# Altium PCB PCB2.PcbDoc
Units mil, origin at the board's own origin, x right, y up, seen from the top; angles counter-clockwise.
Board outline 3600 x 3000 mil, 2 copper layers (Top Layer, Bottom Layer), stack 61.756 mil thick; 20 components, 21 nets, 81 pads, 10 vias.
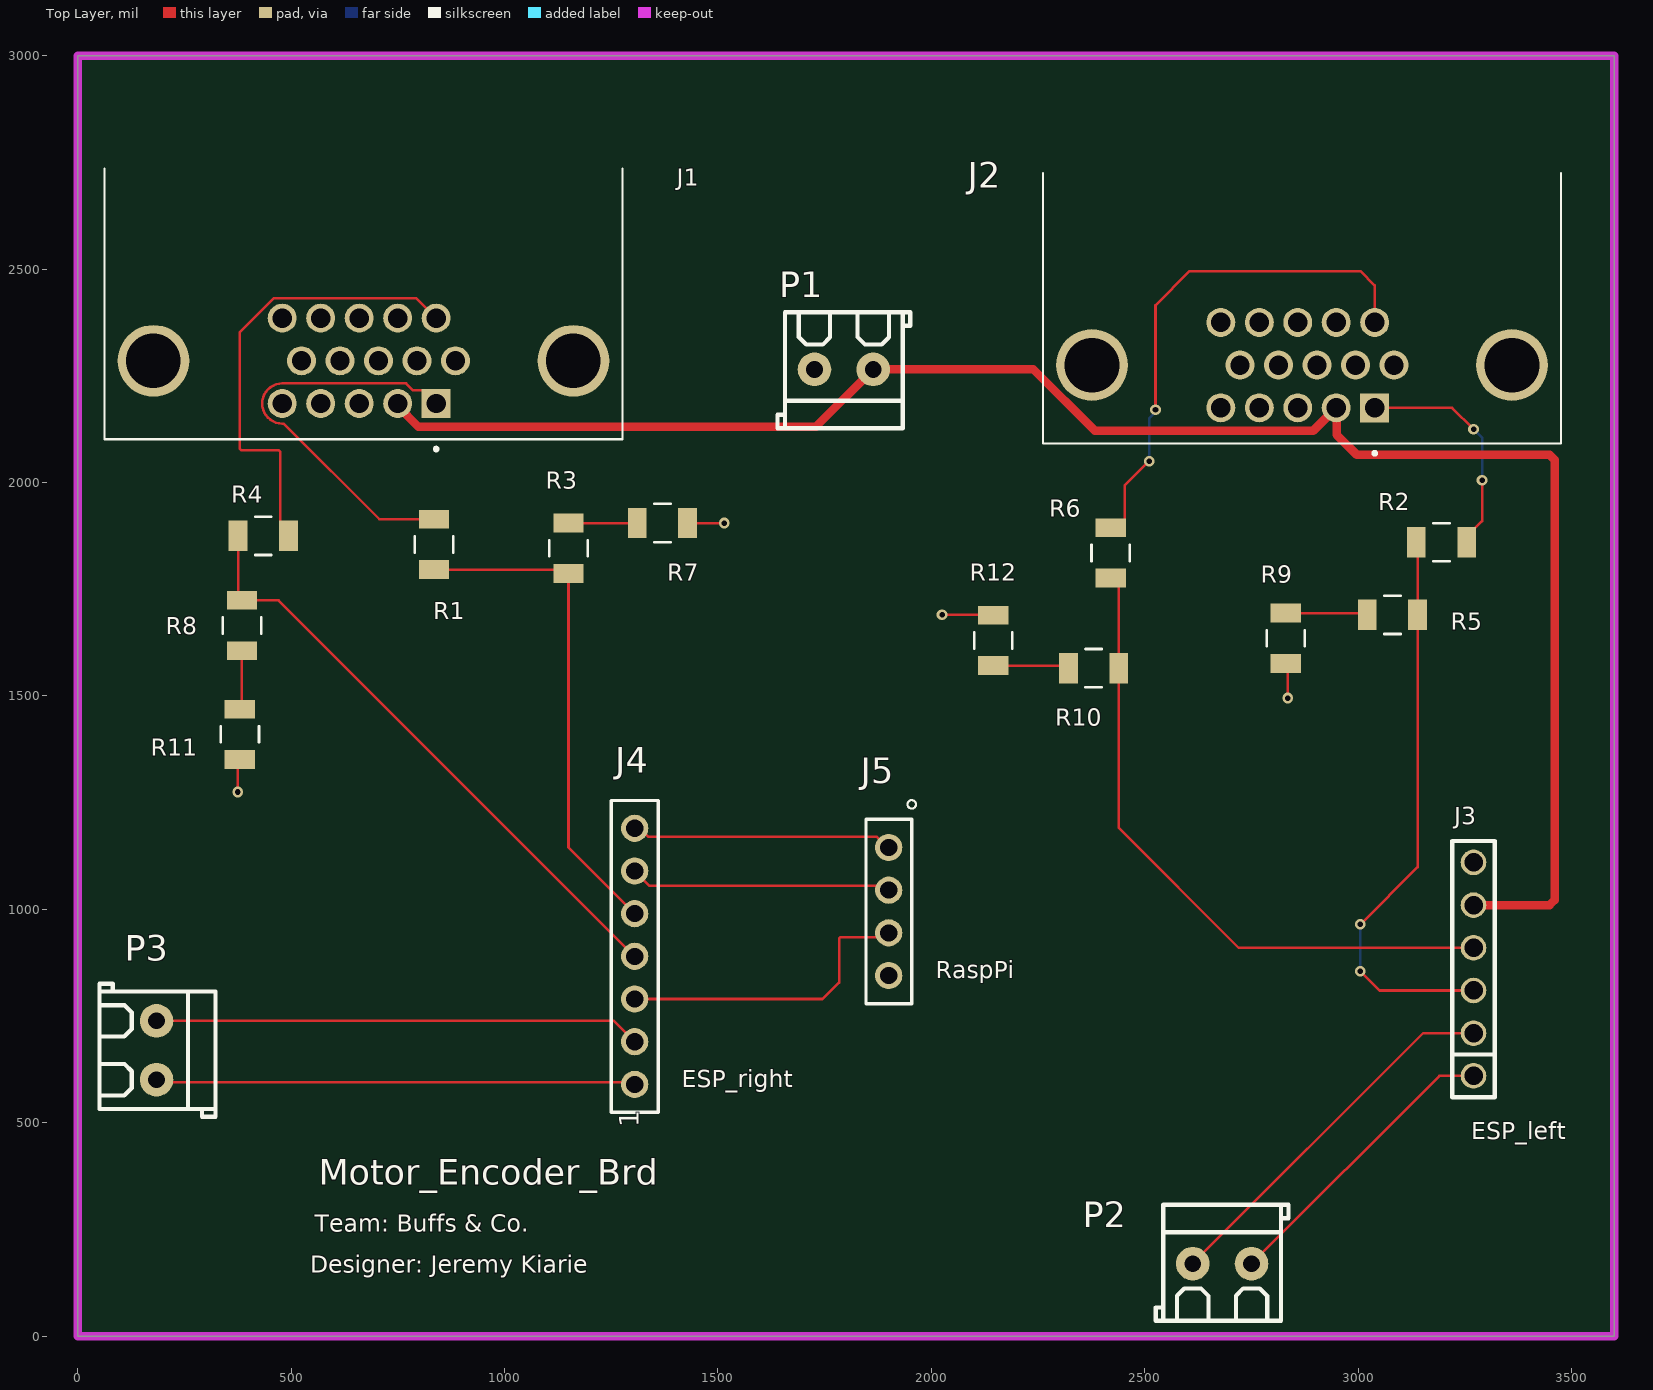
[diagram p0: Top Layer view]
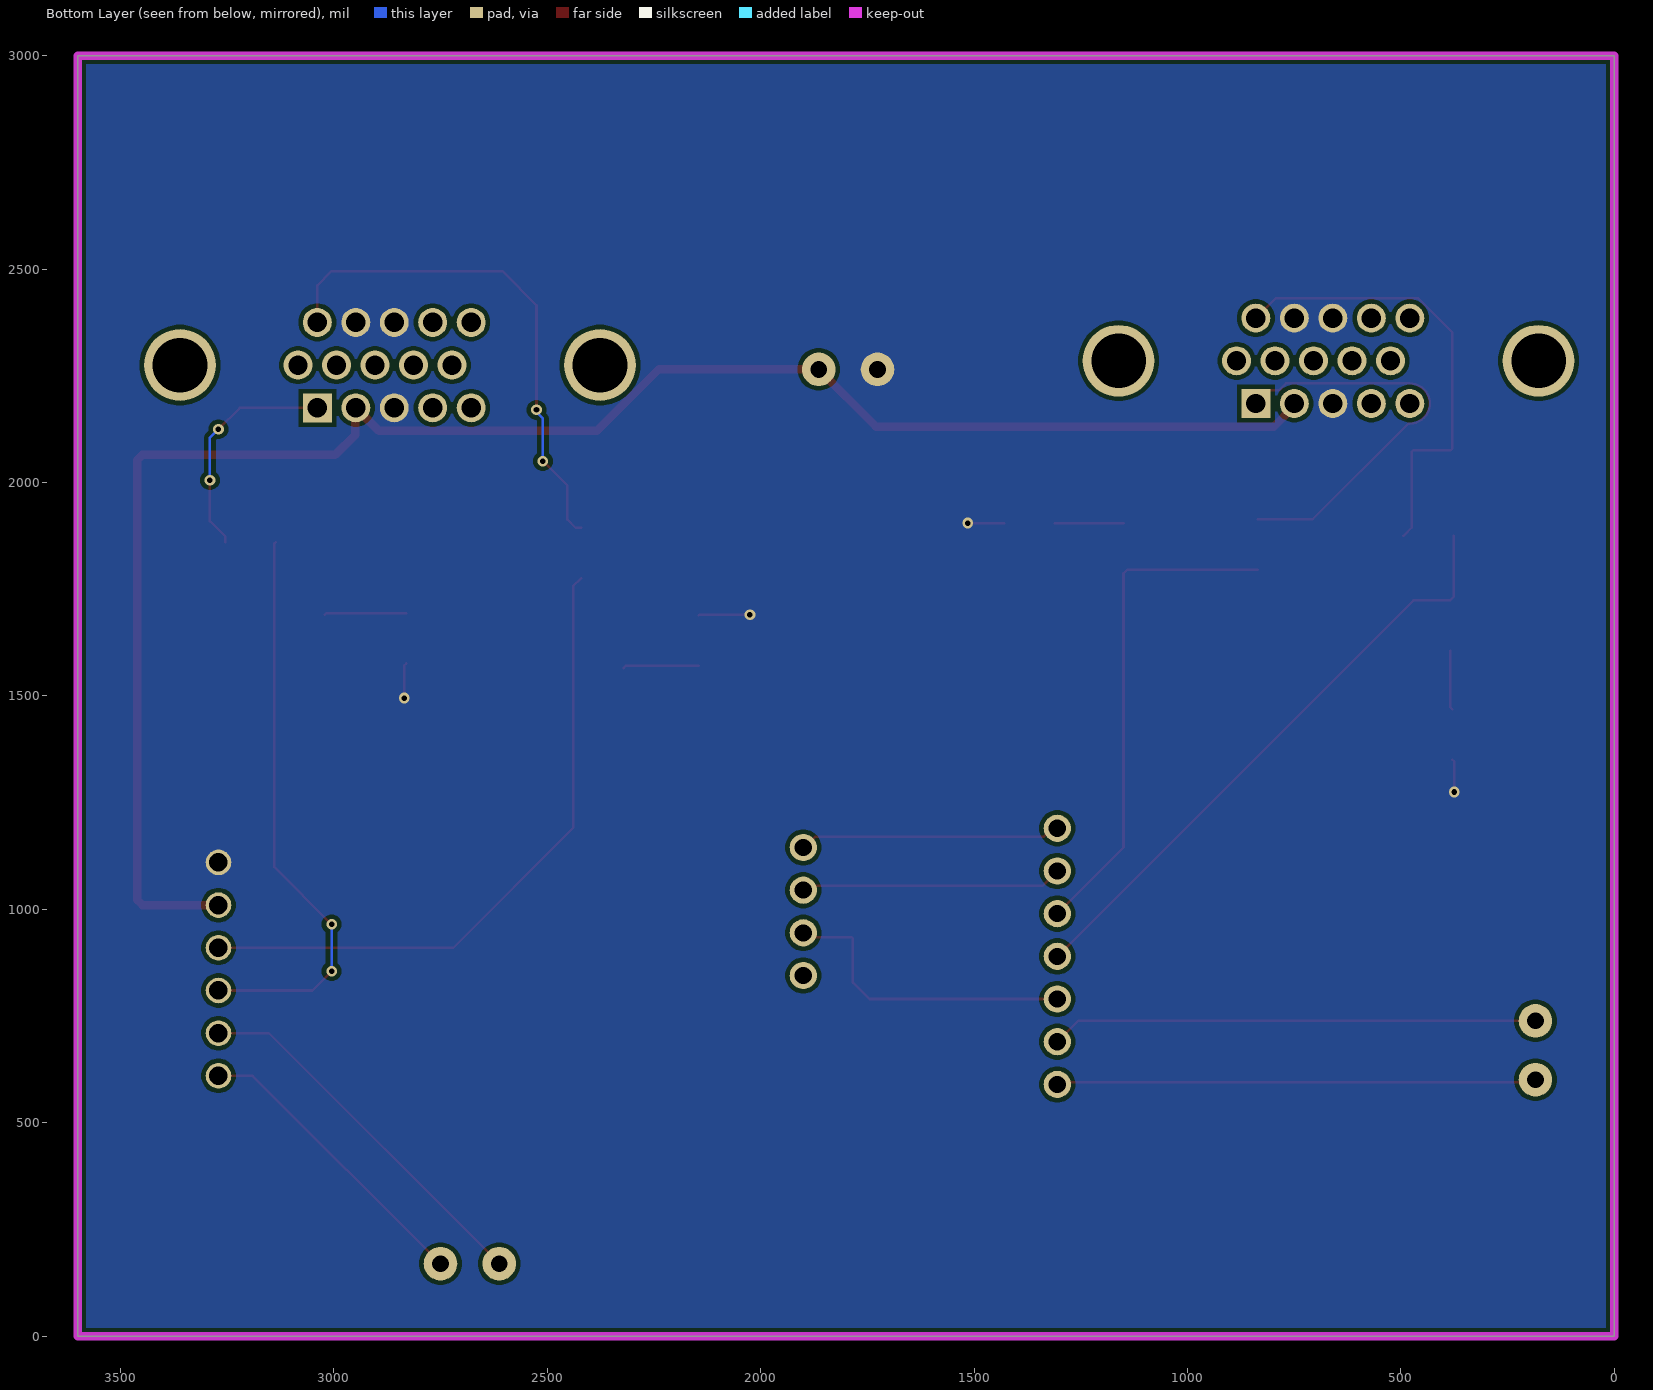
[diagram p1: Bottom Layer view, seen from below]
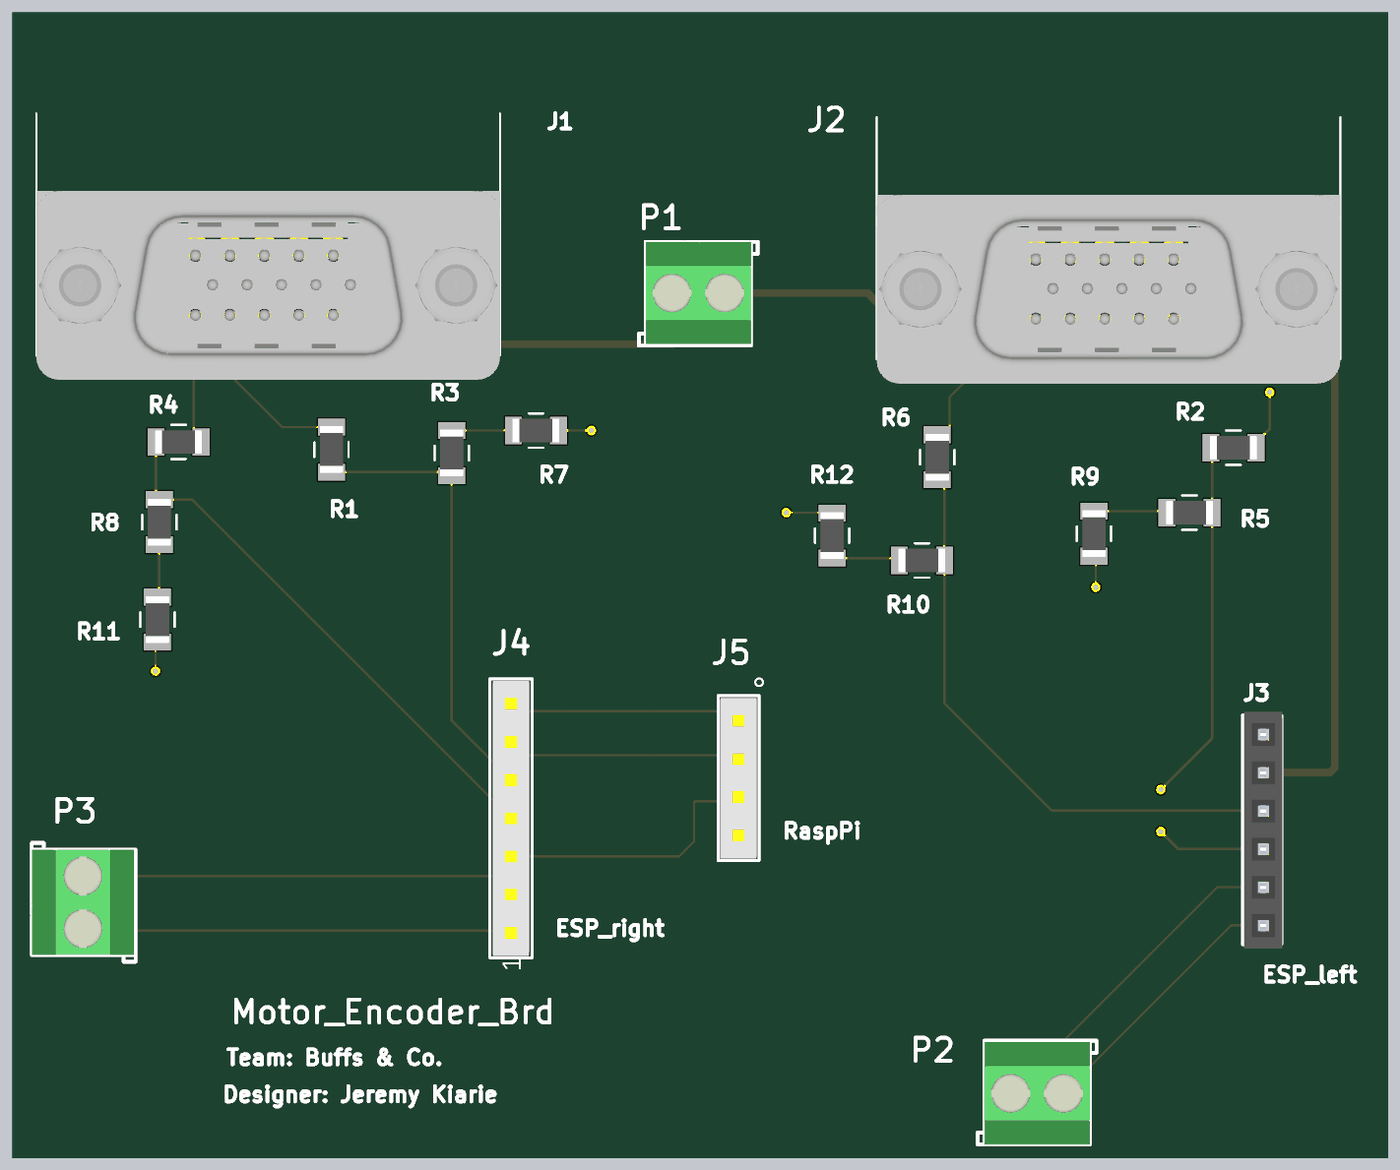
[diagram p2: 3D render of the assembled board from above, using the file's embedded part models]

## Layer stack, top to bottom
Top Solder: solder mask 1, SM-001, Dk 4
Top Layer: signal copper 1.378
Dielectric 1: core 59, Core-043, Dk 4.3
Bottom Layer: signal copper 1.378
Bottom Solder: solder mask 1, SM-001, Dk 4

## Board outline
0,0 3600,0 3600,3000 0,3000

## Design rules (kind name [scope] priority, off if disabled: settings)
Clearance [All] p1: gap=10 ignorepadtopadclearanceinfootprint=FALSE
PlaneClearance [All] p1: clearance=10
PlaneConnect [All] p1: planeconnectstyle=Direct reliefexpansion=20 reliefentries=4 reliefconductorwidth=10 reliefairgap=10
PolygonConnect [All] p1: connectstyle=Direct reliefconductorwidth=10 reliefentries=4 polygonreliefangle="90 Angle" airgapwidth=10
RoutingVias [All] p1: holewidth=13 width=25 viastyle="Through Hole" minholewidth=13 minwidth=25 maxholewidth=60 maxwidth=80
SolderMaskExpansion [All] p1: expansion=4 istentingtop=FALSE
SupplyNets "Schematic Supply Nets_1" [InNet('GND')] p1: voltage=0.000
SupplyNets "Schematic Supply Nets" [InNet('+5')] p2: voltage=0.000
UnRoutedNet [All] p1: checkbadconnections=TRUE
Width "Schematic Width Constraint" [InNet('+5')] p1: maxlimit=100 minlimit=10 preferedwidth=20 minimp=50.000000 maximp=50.000000 favimp=50.000000
Width [All] p2: maxlimit=100 minlimit=6 preferedwidth=6 minimp=50.000000 maximp=50.000000 favimp=50.000000
27 further rules are at their usual default settings.

## Components (designator, comment, footprint, x,y, rotation, side; value= is the part's Value field where it differs from the comment)
J1 "L717HDE15PD1CH4F" AMPHENOL_L717HDE15PD1CH4F 669.53,2285 r180 top
J2 "L717HDE15PD1CH4F" AMPHENOL_L717HDE15PD1CH4F 2868.07,2275 r180 top
J3 "PPTC061LFBN-RC" "6_PIN_100MIL -Female" 3270,610 r90 top value=Female
J4 "SAMTEC-SSQ-107-01-X-SJ" JF-7_SSQ-107-01-X-S 1305,890 r90 top
J5 "SAMTEC-SSQ-104-01-X-SJ" JF-4_SSQ-104-01-X-S 1900,995 r270 top
P1 "2P Screw Terminal Block" "P_Terminal block 3.5mm-pitch" 1795,2265 r180 top
P2 "2P Screw Terminal Block" "P_Terminal block 3.5mm-pitch" 2681.1,170 r0 top
P3 "2P Screw Terminal Block" "P_Terminal block 3.5mm-pitch" 185,670 r270 top
R1 "1k" 1206_Passive_Resitor 835,1855 r90 top value="1K Ohm"
R2 "1k" 1206_Passive_Resitor 3195,1860 r0 top value="1K Ohm"
R3 "1k" 1206_Passive_Resitor 1150,1846 r270 top value="1K Ohm"
R4 "1k" 1206_Passive_Resitor 435,1875 r180 top value="1K Ohm"
R5 "1k" 1206_Passive_Resitor 3080,1690 r0 top value="1K Ohm"
R6 "1k" 1206_Passive_Resitor 2420,1835 r270 top value="1K Ohm"
R7 "1k" 1206_Passive_Resitor 1370,1905 r180 top value="1K Ohm"
R8 "1k" 1206_Passive_Resitor 385,1665 r90 top value="1K Ohm"
R9 "1k" 1206_Passive_Resitor 2830,1635 r90 top value="1K Ohm"
R10 "1k" 1206_Passive_Resitor 2380,1565 r0 top value="1K Ohm"
R11 "1k" 1206_Passive_Resitor 380,1410 r90 top value="1K Ohm"
R12 "1k" 1206_Passive_Resitor 2145,1630 r270 top value="1K Ohm"

## Footprints (in the part's own frame and the unit in brackets; to place one, negate y for a bottom-side part, rotate by r counter-clockwise, add the part's x,y. Pads: shape width x height; smd on the part's side, far side on the other; paste and mask are expansions set on the pad)
"6_PIN_100MIL -Female" [mil]
  round 60 hole 43.31: 1(0,0) 2(100,0) 3(200,0) 4(300,0) 5(400,0) 6(500,0)
  silkscreen extent -50,-50 550,50, body extent -61,-53 559,47, height 335
1206_Passive_Resitor [mil]
  rect 44x71 smd: 1(-59,0) 2(59,0)
  silkscreen extent -19,-45 19,45, body extent -61,-31 61,31, height 26
AMPHENOL_L717HDE15PD1CH4F [mm]
  rect 1.725x1.725 / inner round 1.725 / far side rect 1.725x1.725 hole 1.15: 1(-4.33,2.54)
  round 1.725 hole 1.15: 2(-2.04,2.54) 3(0.25,2.54) 4(2.54,2.54) 5(4.83,2.54) 6(-5.475,0) 7(-3.185,0) 8(-0.895,0) 9(1.395,0) 10(3.685,0) 11(-4.33,-2.54) 12(-2.04,-2.54) 13(0.25,-2.54) 14(2.54,-2.54) 15(4.83,-2.54)
  round 4.266 hole 3.25: SH1(-12.495,0) SH2(12.495,0)
  silkscreen extent -15.41,-11.43 15.41,5.35, body extent -15.41,-10.07 15.41,6.27, height 8.9
JF-4_SSQ-104-01-X-S [mm]
  round 1.62 hole 1.02: 1(-3.81,0) 2(-1.27,0) 3(1.27,0) 4(3.81,0)
  silkscreen extent -6.63,-1.35 5.49,1.63, body extent -5.33,-1.21 5.33,1.21, height 8.51
JF-7_SSQ-107-01-X-S [mm]
  round 1.62 hole 1.02: 1(-7.62,0) 2(-5.08,0) 3(-2.54,0) 4(0,0) 5(2.54,0) 6(5.08,0) 7(7.62,0)
  silkscreen extent -9.27,-1.4 9.27,1.4, body extent -9.14,-1.21 9.14,1.21, height 8.51
"P_Terminal block 3.5mm-pitch" [mm]
  round 2 hole 1: 1(-1.75,0) 2(1.75,0)
  silkscreen extent -3.95,-3.4 3.95,3.5, body extent -3.5,-3.4 3.5,3.4, height 8.4

## Part data
J1 J2: "Dsub, Stamped Signal 3A, High Density, Right Angle PCB Thru Hole, FP=8.89mm (0.35Î¼in), 15 Pin, Flash Gold, 4-40 Front Screwlock, Ground Tab, With Boardlock", Package=None, Check_prices=https://www.snapeda.com/parts/L717HDE15PD1CH4F/Amphenol+FCI/view-part/?ref=eda, MF="Amphenol ICC", MP=L717HDE15PD1CH4F, SnapEDA_Link=https://www.snapeda.com/parts/L717HDE15PD1CH4F/Amphenol+FCI/view-part/?ref=snap
J3: library part JF_6_PIN_FEMALE, "6 Position Header Connector 0.100\" (2.54mm) Through Hole Tin", LCSC Part#=C40877, Digikey Link=https://www.digikey.com/product-detail/en/PPTC061LFBN-RC/S7004-ND/810145/?itemSeq=304982353, MFR Part #=PPTC061LFBN-RC, Type=Extended
J4: library part JF_7_PIN_FEMALE, "2.54mm Brass Straight 1x7P 7 1 Straight,P=2.54mm  Female Headers ROHS", LCSC Part#=C124418, MFR Part #=B-2200S07P-A120, MP=SAMTEC-SSQ-107-01-X-SJ
J5: library part JF_4_PIN_FEMALE, "2.54mm 3A bronze -40℃~+105℃ Straight 1x4P Top 4 1 Square Holes Straight,P=2.54mm  Female Headers ROHS", LCSC Part#=C2718488, MFR Part #=SSQ-104-01-X-SJ
P1 P2 P3: library part "P_Terminal block", "Green Straight pin 3.5mm  pitch; P=3.5mm  Screw terminal ROHS", LCSC Part#=C474892, Manufacturer="Cixi Kefa Elec", MFR Part #=KF350-3.5-2P, Datasheet=https://datasheet.lcsc.com/lcsc/2001160007_Cixi-Kefa-Elec-KF350-3-5-2P_C474892.pdf
R1 R2 R3 R4 R5 R6 R7 R8 R9 R10 R11 R12: library part R_1K_1206, "CHIP RESISTOR - SURFACE MOUNT 1KOHMS ±1% 1/4W 1206 ROHS", LCSC Part#=C4410, MFR Part #=RNCP1206FTD1K00CT, Digikey Link=https://www.digikey.com/product-detail/en/RNCP1206FTD1K00/RNCP1206FTD1K00CT-ND/2240675/?itemSeq=304982373, Type=Basic

## Via types
v1: diameter 25, hole 13, Top Layer to Bottom Layer, 10 vias

## Nets (pads, with @x,y where several pads share a name; then routed paths per layer and width w, separated by ;. In a path a pad name is that pad's centre, name@x,y a point inside that pad or via, vN(x,y) a via of type N, cw(c..) or ccw(c..) an arc to the next point about the centre after c; other vN are vias at no path point)
+5: J1.2 J2.2 J3.5 P1.1 | length 4185.9
  Top Layer w20: J1.2 749.84,2178.96 797.76,2131.04 1729.94,2131.04 P1.1 2239.1,2265 2383.05,2121.04 2894.43,2121.04 J2.2 ; J2.2@2949.3,2174.61 2949.3,2112 2996.3,2065 3448.28,2065 3460,2053.28 3460,1021.72 3448.28,1010 J3.5
D_2: J4.1 P3.2 | length 1124.6
  Top Layer w6: P3.2 190.55,595.55 1299.45,595.55 J4.1
D_4: J4.2 P3.1 | length 1140.3
  Top Layer w6: P3.1 1256.1,738.9 J4.2
D_5: J4.3 J5.3 | length 719.4
  Top Layer w6: J4.3 1745,790 1783.75,828.75 1783.75,931.49 1787.26,935 1890,935 J5.3
D_18: J4.4 R4.2 R8.2 | length 1420.2
  Top Layer w6: R4.2 376,1733 R8.2 471,1724 J4.4
D_19: J4.5 R1.1 R3.2 | length 1179.9
  Top Layer w6: R1.1 1141,1796 R3.2 1150,1145 J4.5
D_21: J4.6 J5.2 | length 613.6
  Top Layer w6: J4.6 1340,1055 1890,1055 J5.2
D_22: J4.7 J5.1 | length 613.6
  Top Layer w6: J4.7 1317.4,1190 1337.4,1170 1872.14,1170 1897.14,1145 J5.1
D_25: J3.1 P2.2 | length 702.3
  Top Layer w6: P2.2 3190,610 J3.1
D_26: J3.2 P2.1 | length 881.5
  Top Layer w6: P2.1 3152.2,710 J3.2
D_32: J3.3 R2.1 R5.2 | length 1345.4
  Top Layer w6: v1(3005,855) 3050,810 J3.3 ; v1(3005,965) 3139,1099 R5.2 3139,1857 R2.1
  Bottom Layer w6: v1(3005,855) v1(3005,965)
D_33: J3.4 R6.2 R10.2 | length 1540.3
  Top Layer w6: R6.2 2439,1757 R10.2 2439,1191 2720,910 J3.4
GND: J1.3 J1.12 J1.13 J2.3 J2.12 J2.13 J3.6 P1.2 R7.1 R9.1 R11.1 R12.1 | length 367.6
  Top Layer w6: v1(375,1275) 375,1346 R11.1 ; R7.1 v1(1515,1905) ; v1(2025,1690) 2144,1690 R12.1 ; R9.1 2835,1571 v1(2835,1495)
NetJ1_1: J1.1 R1.2 | length 976
  Top Layer w6: R1.2 706.59,1914 484.3,2136.29 482.55,2138.04 479.18,2138.04 cw(c479.37,2185) 479.37,2231.96 769.29,2231.96 785.29,2215.96 809.04,2215.96 J1.1
NetJ1_11: J1.11 R4.1 | length 1088.3
  Top Layer w6: R4.1 475,1894 475,2071.49 471.49,2075 383.51,2075 380,2078.51 380,2352.04 459.92,2431.96 793.04,2431.96 J1.11
NetJ2_1: J2.1 R2.2 | length 540.4
  Top Layer w6: J2.1 3220,2175 v1(3270,2125) ; R2.2 3254,1873.5 3290,1909.5 v1(3290,2005)
  Bottom Layer w6: v1(3270,2125) 3290,2105 v1(3290,2005)
NetJ2_11: J2.11 R6.1 | length 1219.4
  Top Layer w6: R6.1 2433.5,1894 2452.5,1913 2452.5,1992.5 v1(2510,2050) ; v1(2525,2170) 2525,2415 2605,2495 3005,2495 3038.54,2461.46 J2.11
  Bottom Layer w6: v1(2510,2050) 2510,2150 2525,2165 v1(2525,2170)
NetR3_1: R3.1 R7.2 | length 161
  Top Layer w6: R3.1 R7.2
NetR5_1: R5.1 R9.2 | length 192.7
  Top Layer w6: R9.2 3017,1694 R5.1
NetR8_1: R8.1 R11.2 | length 139.1
  Top Layer w6: R11.2 385,1474 R8.1
NetR10_1: R10.1 R12.2 | length 178.5
  Top Layer w6: R12.2 2315,1571 R10.1
pads on no net: J1.4 J1.5 J1.6 J1.7 J1.8 J1.9 J1.10 J1.14 J1.15 J1.SH1 J1.SH2 J2.4 J2.5 J2.6 J2.7 J2.8 J2.9 J2.10 J2.14 J2.15 J2.SH1 J2.SH2 J5.4

## Polygon pours and split planes (outlines as drawn)
GND on Bottom Layer "GND_L02_P000" (solid, pour order 0): 0,3000 3600,3000 3600,0 0,0

## Keep-outs
Keep-Out Layer:
  the board outline again, w20

## Silkscreen, mask and mechanical layers (free items; w line width, h text height)
Top Overlay:
  text "RaspPi" at 2010,838.33 h40
  text "ESP_right" at 1415,583.33 h40
  text "ESP_left" at 3265,461.66 h40
  text "Motor_Encoder_Brd" at 565,355 h60
  text "Team: Buffs & Co." at 555,245 h40
  text "Designer: Jeremy Kiarie" at 545,148.33 h40

## Text inside footprints (layer, text, board x,y; h text height)
J1: Mechanical 13 "PCB EDGE" at 49.45,2727.91 h40 r180
J2: Mechanical 13 "PCB EDGE" at 2247.99,2717.91 h40 r180
J4: Top Overlay "1" at 1330,490 h77.5 r90